# Altium PCB PCB.PcbDoc
Units mm, origin at the board's own origin, x right, y up, seen from the top; angles counter-clockwise.
Board outline 65.41 x 28.58 mm, 2 copper layers (Top Layer, Bottom Layer); 25 components, 20 nets, 104 pads, 21 vias.
Unrouted connection lines stored in the file: 1.
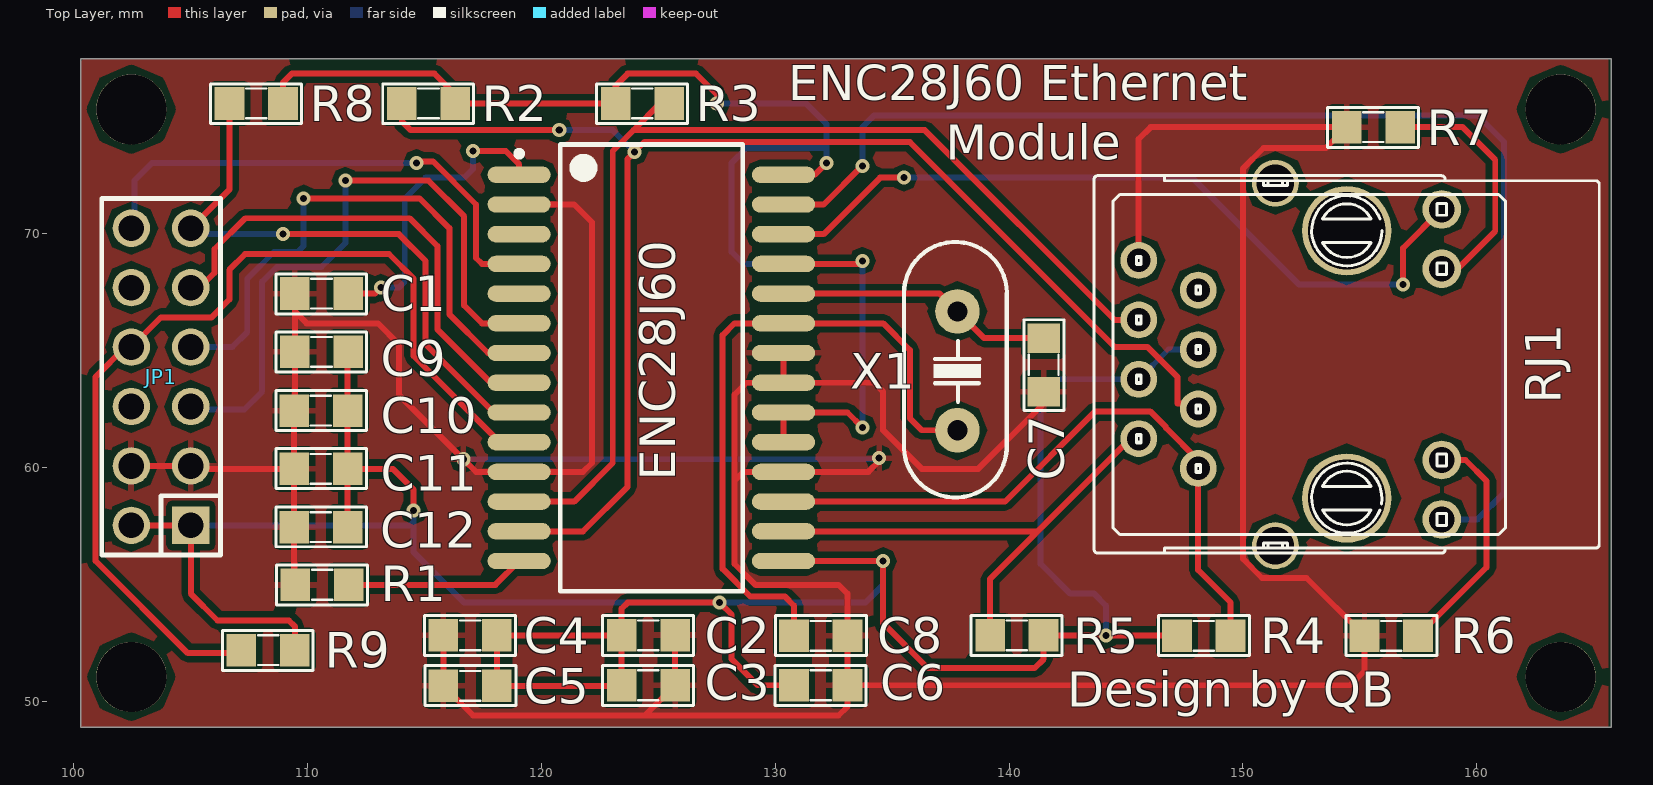
[diagram p0: Top Layer view]
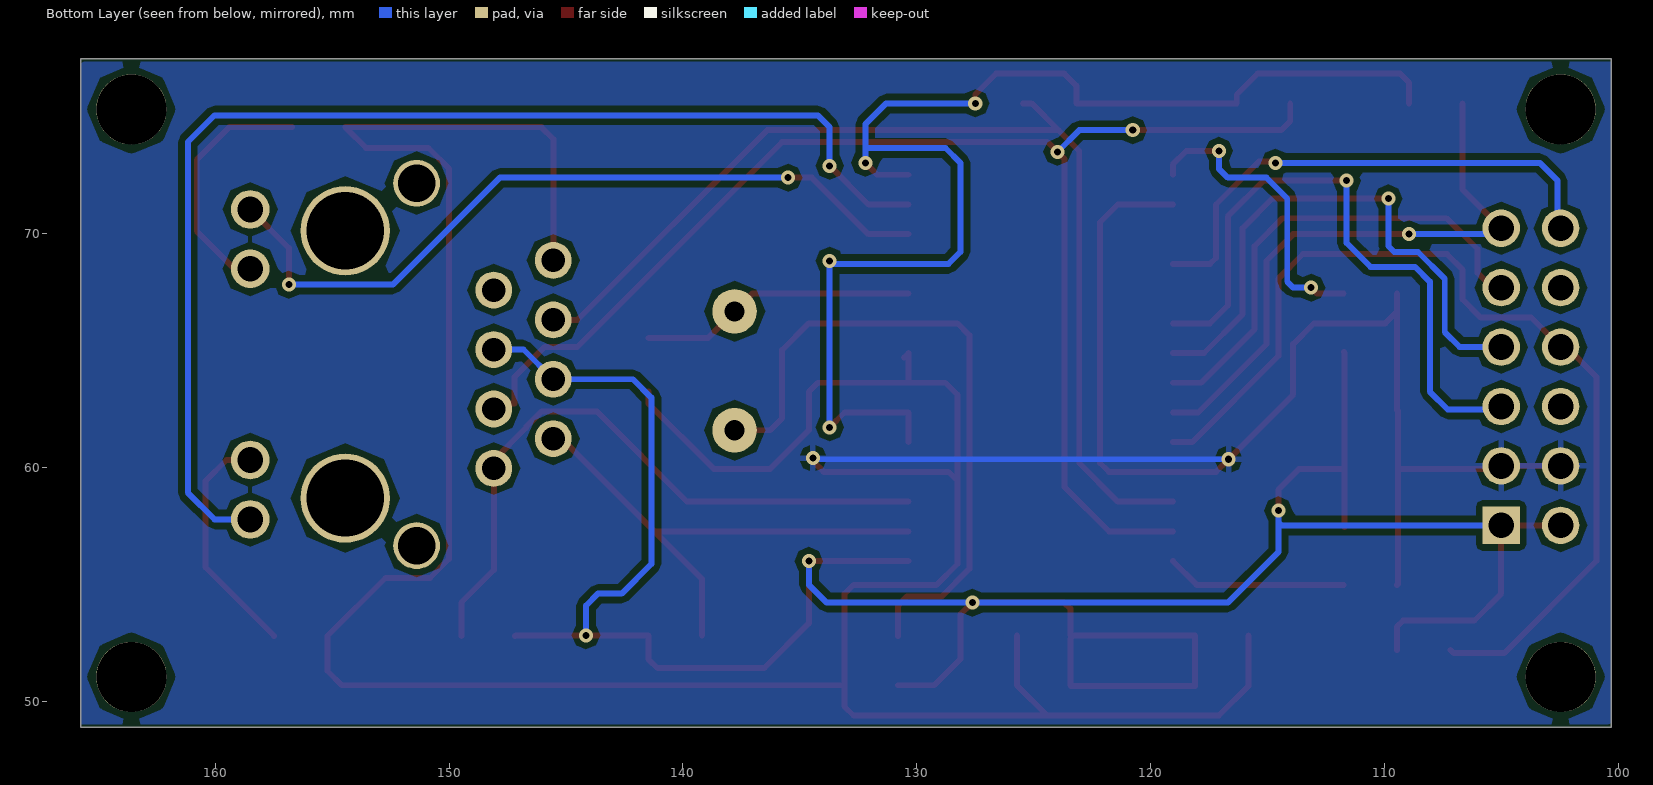
[diagram p1: Bottom Layer view, seen from below]
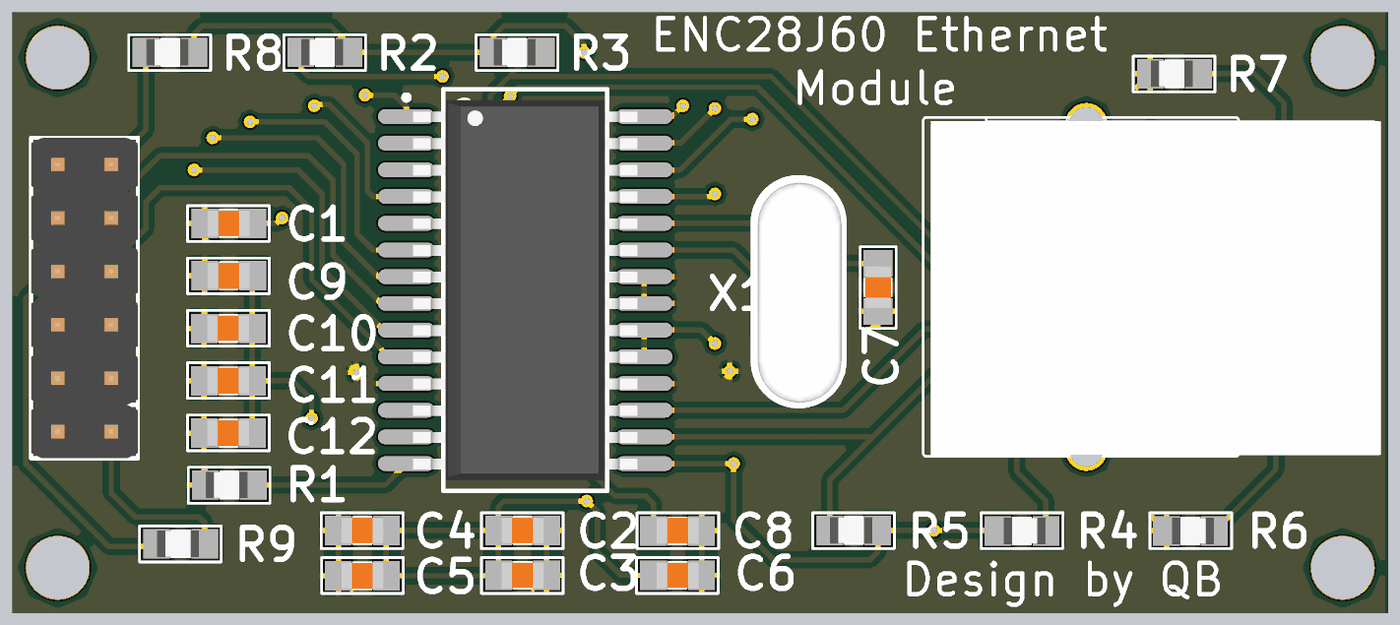
[diagram p2: 3D render of the assembled board from above, using the file's embedded part models]

## Layer stack, top to bottom
Top Solder: solder mask 0.0102, Solder Resist, Dk 3.5
Top Layer: signal copper 0.0356
Dielectric 1: dielectric 0.32, FR-4, Dk 4.8
Bottom Layer: signal copper 0.0356
Bottom Solder: solder mask 0.0102, Solder Resist, Dk 3.5

## Board outline
100.33,48.895 165.735,48.895 165.735,77.47 100.33,77.47

## Design rules (kind name [scope] priority, off if disabled: settings)
Clearance [All] p1: gap=0.254 ignorepadtopadclearanceinfootprint=FALSE except(0: Arc-Hole Track-Hole SMDPad-Hole THPad-Hole Via-Hole Fill-Hole Poly-Hole Region-Hole Text-Hole)
PolygonConnect [All] p1: connectstyle=Relief reliefconductorwidth=0.254 reliefentries=4 polygonreliefangle="90 Angle" airgapwidth=0.254
RoutingVias [All] p1: holewidth=0.3 width=0.6 viastyle="Through Hole" minholewidth=0.3 minwidth=0.6 maxholewidth=0.3 maxwidth=0.6
SolderMaskExpansion [All] p1: expansion=0.102
Width [All] p1: maxlimit=0.254 minlimit=0.254 preferedwidth=0.254
30 further rules are at their usual default settings.

## Components (designator, comment, footprint, x,y, rotation, side; value= is the part's Value field where it differs from the comment)
C1 "10uF" CAP_0805 110.617,67.437 r0 top value=33p
C2 "1uF" CAP_0805 124.587,52.832 r0 top value=33p
C3 "1uF" CAP_0805 124.587,50.698 r0 top value=33p
C4 "1uF" CAP_0805 116.967,52.832 r0 top value=33p
C5 "1uF" CAP_0805 116.967,50.673 r180 top value=33p
C6 "1uF" CAP_0805 131.953,50.698 r0 top value=33p
C7 "20pF" CAP_0805 141.478,64.389 r90 top value=33p
C8 "20pF" CAP_0805 131.953,52.807 r180 top value=33p
C9 "1uF" CAP_0805 110.617,64.948 r0 top value=33p
C10 "1uF" CAP_0805 110.592,62.433 r180 top value=33p
C11 "1uF" CAP_0805 110.592,59.944 r180 top value=33p
C12 "1uF" CAP_0805 110.592,57.455 r180 top value=33p
ENC28J60 "ENC28J60?" SOP_28M_127 124.714,64.262 r0 top
JP1 "JP6x2" JP6-D2T 103.759,63.881 r90 top
R1 "1k" RES_0805 110.642,54.991 r0 top value="R1/4W - 1K"
R2 "1k" RES_0805 115.189,75.565 r0 top value="R1/4W - 1K"
R3 "1k" RES_0805 124.333,75.565 r0 top value="R1/4W - 1K"
R4 "1k" RES_0805 148.323,52.807 r180 top value="R1/4W - 1K"
R5 "1k" RES_0805 140.335,52.832 r0 top value="R1/4W - 1K"
R6 "1K" RES_0805 156.337,52.807 r180 top value="R1/4W - 1K"
R7 "1K" RES_0805 155.575,74.549 r0 top value="R1/4W - 1K"
R8 "10K" RES_0805 107.823,75.565 r0 top value="R1/4W - 1K"
R9 "10K" RES_0805 108.331,52.197 r0 top value="R1/4W - 1K"
RJ1 "RJ45" RJ45 148.086,59.965 r90 top
X1 "25Mhz" XT2 137.795,64.135 r90 top value=4Mhz

## Footprints (in the part's own frame and the unit in brackets; to place one, negate y for a bottom-side part, rotate by r counter-clockwise, add the part's x,y. Pads: shape width x height; smd on the part's side, far side on the other; paste and mask are expansions set on the pad)
CAP_0805 [mil] "Compoment SMD 80x50mil"
  rect 50x55 smd: 1(-45,0) 2(45,0)
  silkscreen extent -77,-34 76,33, body extent -39,-25 39,24, height 31
JP6-D2T [mm] "12 pins, dual pin, straight, gold plating"
  rect 1.6x1.6 hole 1.1: 1(-6.35,-1.27)
  round 1.6 hole 1.1: 2(-3.81,-1.27) 3(-1.27,-1.27) 4(1.27,-1.27) 5(3.81,-1.27) 6(6.35,-1.27) 7(6.35,1.27) 8(3.81,1.27) 9(1.27,1.27) 10(-1.27,1.27) 11(-3.81,1.27) 12(-6.35,1.27)
  silkscreen extent -7.62,-2.54 7.62,2.54, body extent -7.62,-2.54 7.62,2.54, height 8.55
RES_0805 [mil] "Compoment SMD 80x50mil"
  rect 50x55 smd: 1(-45,0) 2(45,0)
  silkscreen extent -77,-34 76,33, body extent -44,-25 34,25, height 17
RJ45 [mm]
  round 1.575 hole 1: 1(0,0) 2(1.27,2.54) 3(2.54,0) 4(3.81,2.54) 5(5.08,0) 6(6.35,2.54) 7(7.62,0) 8(8.89,2.54)
  round 1.65 hole 1.1: 9(-2.18,-10.41) 10(0.36,-10.41) 11(8.53,-10.41) 12(11.07,-10.41)
  round 3.81 hole 3.3: HM1(-1.27,-6.35) HM2(10.16,-6.35)
  round 2 hole 1.6: HM3(-3.3,-3.3) HM4(12.19,-3.3)
  silkscreen extent -3.62,-17.14 12.51,4.45, body extent -3.56,-17.3 12.32,4.1, height 13.5
SOP_28M_127 [mm] "SOP, 28-Leads, Body 18.1x8.6mm, Pitch 1.27mm, IPC Low Density"
  oval 2.7x0.7 smd: 1(-5.65,8.255) 2(-5.65,6.985) 3(-5.65,5.715) 4(-5.65,4.445) 5(-5.65,3.175) 6(-5.65,1.905) 7(-5.65,0.635) 8(-5.65,-0.635) 9(-5.65,-1.905) 10(-5.65,-3.175) 11(-5.65,-4.445) 12(-5.65,-5.715) 13(-5.65,-6.985) 14(-5.65,-8.255) 15(5.65,-8.255) 16(5.65,-6.985) 17(5.65,-5.715) 18(5.65,-4.445) 19(5.65,-3.175) 20(5.65,-1.905) 21(5.65,-0.635) 22(5.65,0.635) 23(5.65,1.905) 24(5.65,3.175) 25(5.65,4.445) 26(5.65,5.715) 27(5.65,6.985) 28(5.65,8.255)
  silkscreen extent -5.77,-9.55 3.9,9.55, body extent -5.34,-9.04 5.33,9.04, height 2.64
XT2 [mil] "Footpin for Crystal 2 pin"
  round 75 hole 34: 1(-100,0) 2(100,0)
  silkscreen extent -213,-83 217,90, body extent -216,-87 216,90, height 144

## Part data
C1 C2 C3 C4 C5 C6 C7 C8 C9 C10 C11 C12: library part CapSMD, "Capacitor", LatestRevisionDate=17-Jul-2002, LatestRevisionNote="Re-released for DXP Platform.", PackageReference=RAD-0.3, Published=8-Jun-2000, Publisher="Altium Limited"
ENC28J60: library part ENC28J60
JP1: "WR-PHD 2.54 mm Dual Socket Header", Manufacturer="Würth Elektronik eiSos GmbH", partNo=61301221821, ComponentLink1 Description=Manufacturer, ComponentLink1URL=http://www.we-online.com, ComponentLink2 Description=Datasheet, ComponentLink2URL=http://katalog.we-online.de/em/datasheet/6130xx21821.pdf, Created by="Karrer Zheng", Created Date="29 March 2013", NoPins=12
R1 R2 R3 R4 R5 R6 R7 R8 R9: library part Res_0805, "Resistor 1/4W"
RJ1: library part RJ45-Con
X1: library part XT2, "Crystal, 32.768 KHz, -40 to 85 degC, 3.2 x 1.5 x 0.9 mm SMD"

## Free pads (board coordinates)
  round 3 hole 3: PAD1(163.576,75.311) PAD2(163.576,51.054) PAD3(102.489,75.311) PAD4(102.489,51.054)

## Via types
v1: diameter 0.6, hole 0.3, Top Layer to Bottom Layer, 21 vias

## Nets (pads, with @x,y where several pads share a name; then routed paths per layer and width w, separated by ;. In a path a pad name is that pad's centre, name@x,y a point inside that pad or via, vN(x,y) a via of type N, cw(c..) or ccw(c..) an arc to the next point about the centre after c; other vN are vias at no path point)
3.3V: C2.1 C3.1 C4.2 C5.1 C6.1 C9.2 C10.1 C11.1 C12.1 ENC28J60.15 ENC28J60.19 ENC28J60.20 ENC28J60.25 ENC28J60.28 JP1.1 JP1.12 R2.2 R3.1 R4.2 R5.2 R8.2 R9.2 RJ1.4 RJ1.5 | length 184
  Top Layer w0.254: JP1.12 JP1.1 105.029,54.61 106.172,53.467 109.22,53.467 109.474,53.213 R9.2 ; R8.2 108.966,76.454 109.347,76.835 115.443,76.835 116.332,75.946 R2.2 R3.1 123.19,76.327 123.698,76.835 126.619,76.835 127.508,75.946 v1(127.508,75.565) ; C12.1 C11.1 ; C9.2 111.735,64.922 C10.1 C11.1 ; v1(114.554,58.166) 114.554,59.055 113.665,59.944 C11.1 ; C2.1 123.444,53.975 123.698,54.229 v1(127.635,54.229) 128.143,53.721 128.143,51.816 129.261,50.698 C6.1 ; ENC28J60.15 v1(134.62,56.007) 134.62,53.34 136.525,51.435 141.097,51.435 141.478,51.816 R5.2 v1(144.145,52.832) 147.155,52.832 R4.2 ; ENC28J60.19 ENC28J60.20 133.096,62.357 v1(133.731,61.722) ; ENC28J60.25 133.604,68.707 v1(133.731,68.834) ; ENC28J60.28 131.699,72.517 v1(132.207,73.025) ; C5.1 123.419,50.673 C3.1 123.444,52.705 123.317,52.832 C4.2 C5.1
  Bottom Layer w0.254: JP1.1 114.427,57.531 114.554,57.658 ; v1(114.554,58.166) 114.554,57.658 ; v1(127.508,75.565) 131.318,75.565 132.207,74.676 132.207,73.66 ; v1(132.207,73.025) 132.207,73.66 ; v1(133.731,61.722) v1(133.731,68.834) 133.604,68.707 128.651,68.707 128.143,69.215 128.143,73.025 128.778,73.66 132.207,73.66 ; v1(134.62,56.007) 134.62,54.991 133.858,54.229 v1(127.635,54.229) 116.713,54.229 114.554,56.388 114.554,57.658 ; v1(144.145,52.832) 144.145,54.102 143.637,54.61 142.621,54.61 141.351,55.88 141.351,62.992 142.134,63.775 RJ1.4 146.816,65.045 RJ1.5
CS: ENC28J60.9 JP1.6 R8.1 | length 25.4
  Top Layer w0.254: JP1.6 106.68,71.882 R8.1 ; v1(108.966,69.977) 113.919,69.977 115.062,68.834 115.062,65.278 117.983,62.357 ENC28J60.9
  Bottom Layer w0.254: JP1.6 105.283,69.977 v1(108.966,69.977)
GND: C1.1 C2.2 C3.2 C4.1 C5.2 C6.2 C7.1 C8.1 C9.1 C10.2 C11.2 C12.2 ENC28J60.2 ENC28J60.11 ENC28J60.18 ENC28J60.21 ENC28J60.22 JP1.2 JP1.11 R1.1 R6.2 R7.1 | length 201.7
  Top Layer w0.254: JP1.11 JP1.2 105.156,59.944 C11.2 ; R1.1@109.474,54.991 109.449,55.016 C12.2 C11.2 ; C1.1 109.474,66.675 ; C4.1 C5.2 117.094,49.403 124.435,49.403 ; ENC28J60.2 121.412,71.247 122.174,70.485 122.174,60.198 121.793,59.817 ENC28J60.11 117.221,59.817 v1(116.681,60.357) 113.919,63.119 113.919,65.278 113.03,66.167 109.982,66.167 109.474,66.675 ; C2.2 C3.2 124.435,49.403 ; ENC28J60.22@130.556,64.705 ENC28J60.22 ENC28J60.21 ; v1(134.445,60.404) 134.445,60.277 133.985,59.817 ENC28J60.18 128.651,59.817 128.27,59.436 ; C7.1 141.478,62.738 138.684,59.944 136.271,59.944 134.62,61.595 134.62,63.246 134.239,63.627 ENC28J60.21 ; 145.546,68.855 145.542,68.859 145.542,74.041 146.05,74.549 R7.1 153.543,73.66 150.876,73.66 150.005,72.789 150.005,56.093 150.814,55.284 152.717,55.284 R6.2 155.194,51.308 154.584,50.698 C6.2 ; C11.2 C10.2 109.474,62.459 C9.1 109.474,66.675 ; 124.435,49.403 132.715,49.403 133.096,49.784 C6.2 ; 128.27,59.436 128.27,55.88 129.159,54.991 132.715,54.991 133.096,54.61 C8.1 C6.2 ; 128.27,59.436 128.27,63.119 128.778,63.627 ENC28J60.21
  Bottom Layer w0.254: v1(116.681,60.357) 134.398,60.357 v1(134.445,60.404)
INT: ENC28J60.4 JP1.7 | length 22
  Top Layer w0.254: v1(114.681,73.025) 114.745,73.088 115.379,73.088 117.221,71.247 117.221,68.961 117.475,68.707 ENC28J60.4
  Bottom Layer w0.254: JP1.7 102.616,70.358 102.616,72.263 103.378,73.025 v1(114.681,73.025)
LEDA: ENC28J60.27 RJ1.9 | length 51.9
  Top Layer w0.254: ENC28J60.27 132.08,71.247 v1(133.731,72.898)
  Bottom Layer w0.254: v1(133.731,72.898) 133.731,74.549 134.239,75.057 160.02,75.057 161.163,73.914 161.163,58.928 160.02,57.785 RJ1.9
LEDB: ENC28J60.26 RJ1.12 | length 33.3
  Top Layer w0.254: ENC28J60.26 132.08,69.977 134.493,72.39 v1(135.509,72.39) ; v1(156.845,67.818) 156.845,69.384 RJ1.12
  Bottom Layer w0.254: v1(135.509,72.39) 147.828,72.39 152.4,67.818 v1(156.845,67.818)
MISO: ENC28J60.6 JP1.3 | length 27.2
  Top Layer w0.254: v1(111.633,72.263) 115.189,72.263 116.713,70.739 116.713,66.929 117.475,66.167 ENC28J60.6
  Bottom Layer w0.254: JP1.3 105.156,62.484 107.315,62.484 108.077,63.246 108.077,67.945 108.712,68.58 110.617,68.58 111.633,69.596 v1(111.633,72.263)
MOSI: ENC28J60.7 JP1.4 | length 24.1
  Top Layer w0.254: v1(109.855,71.501) 114.808,71.501 116.078,70.231 116.078,66.548 117.729,64.897 ENC28J60.7
  Bottom Layer w0.254: JP1.4 106.807,65.151 107.442,65.786 107.442,68.072 108.585,69.215 109.601,69.215 109.855,69.469 v1(109.855,71.501)
NetC1_2: C1.2 ENC28J60.1 | length 13
  Top Layer w0.254: C1.2 112.903,67.437 v1(113.157,67.691) ; v1(117.094,73.533) 118.491,73.533 119.064,72.96 ENC28J60.1
  Bottom Layer w0.254: v1(113.157,67.691) 113.919,67.691 114.173,67.945 114.173,71.501 115.062,72.39 116.713,72.39 117.094,72.771 v1(117.094,73.533)
NetC7_2: C7.2 ENC28J60.24 X1.2 | length 11.9
  Top Layer w0.254: ENC28J60.24 137.033,67.437 X1.2 138.938,65.532 C7.2
NetC8_2: C8.2 ENC28J60.23 X1.1 | length 28.8
  Top Layer w0.254: C8.2 130.81,54.102 130.429,54.483 128.949,54.483 127.762,55.67 127.762,65.659 128.27,66.167 ENC28J60.23 134.62,66.167 135.763,65.024 135.763,62.103 136.271,61.595 X1.1
NetENC28J60_14: ENC28J60.14 R1.2 | length 7.7
  Top Layer w0.254: R1.2@111.76,54.991 R1.2 118.048,54.991 ENC28J60.14
NetR6_1: R6.1 RJ1.10 | length 10.1
  Top Layer w0.254: R6.1 160.401,55.728 160.401,59.436 159.512,60.325 RJ1.10
NetR7_2: R7.2 RJ1.11 | length 10.6
  Top Layer w0.254: R7.2 159.385,74.549 160.782,73.152 160.782,70.104 159.173,68.495 RJ1.11
RESET: ENC28J60.10 JP1.9 R9.1 | length 42.1
  Top Layer w0.254: R9.1 107.061,52.07 104.902,52.07 100.965,56.007 100.965,63.881 102.235,65.151 JP1.9 103.759,66.421 105.918,66.421 106.68,67.183 106.68,68.453 107.353,69.126 113.5,69.126 114.554,68.072 114.554,64.77 118.237,61.087 ENC28J60.10
SCK: ENC28J60.8 JP1.5 | length 20.9
  Top Layer w0.254: JP1.5 105.41,67.691 106.045,68.326 106.045,69.342 107.361,70.658 114.381,70.658 115.57,69.469 115.57,65.913 117.856,63.627 ENC28J60.8
TPIN+: ENC28J60.13 R2.1 RJ1.3 | length 60.8
  Top Layer w0.254: R2.1 114.046,74.803 114.427,74.422 v1(120.777,74.422) ; ENC28J60.13 121.793,57.277 123.698,59.182 123.698,73.196 v1(123.994,73.491) 124.416,73.914 135.763,73.914 144.53,65.147 145.927,65.147 147.193,63.881 147.193,62.738 147.853,62.738 RJ1.3
  Bottom Layer w0.254: v1(120.777,74.422) 123.063,74.422 v1(123.994,73.491)
TPIN-: ENC28J60.12 R3.2 RJ1.6 | length 46.2
  Top Layer w0.254: ENC28J60.12 121.412,58.547 123.063,60.198 123.063,73.533 123.952,74.422 ; R3.2 125.095,75.565 123.952,74.422 ; RJ1.6 144.505,66.315 136.398,74.422 123.952,74.422
TPOUT+: ENC28J60.17 R4.1 RJ1.1 | length 28.3
  Top Layer w0.254: ENC28J60.17 139.827,58.547 143.683,62.403 146.03,62.403 146.714,61.719 146.714,61.693 148.086,60.321 RJ1.1 148.086,55.622 149.466,54.242 R4.1
TPOUT-: ENC28J60.16 R5.1 RJ1.2 | length 22.1
  Top Layer w0.254: ENC28J60.16 141.224,57.277 ; R5.1 139.192,55.245 141.224,57.277 ; RJ1.2 145.182,61.235 141.224,57.277
pads on no net: ENC28J60.3 ENC28J60.5 JP1.8 JP1.10 RJ1.7 RJ1.8 RJ1.HM1 RJ1.HM2 RJ1.HM3 RJ1.HM4

## Polygon pours and split planes (outlines as drawn)
GND on Bottom Layer "Top" (solid, pour order 8): 165.735,77.47 165.608,77.343 100.33,77.343 100.33,48.895 100.457,49.022 165.735,49.022
GND on Top Layer "Top" (solid, pour order 10): 165.608,77.47 165.608,48.895 100.33,48.895 100.33,77.343 100.457,77.47

## Silkscreen, mask and mechanical layers (free items; w line width, h text height)
Top Overlay:
  text "ENC28J60 Ethernet" at 130.556,75.692 h1.5
  text "Module" at 137.287,73.152 h1.5
  text "Design by QB" at 142.494,49.784 h1.5